# Altium PCB PowerBoard.PcbDoc
Units mm, origin at the board's own origin, x right, y up, seen from the top; angles counter-clockwise.
Board outline 97.03 x 53.34 mm, 2 copper layers (Top Layer, Bottom Layer); 64 components, 48 nets, 194 pads, 43 vias.
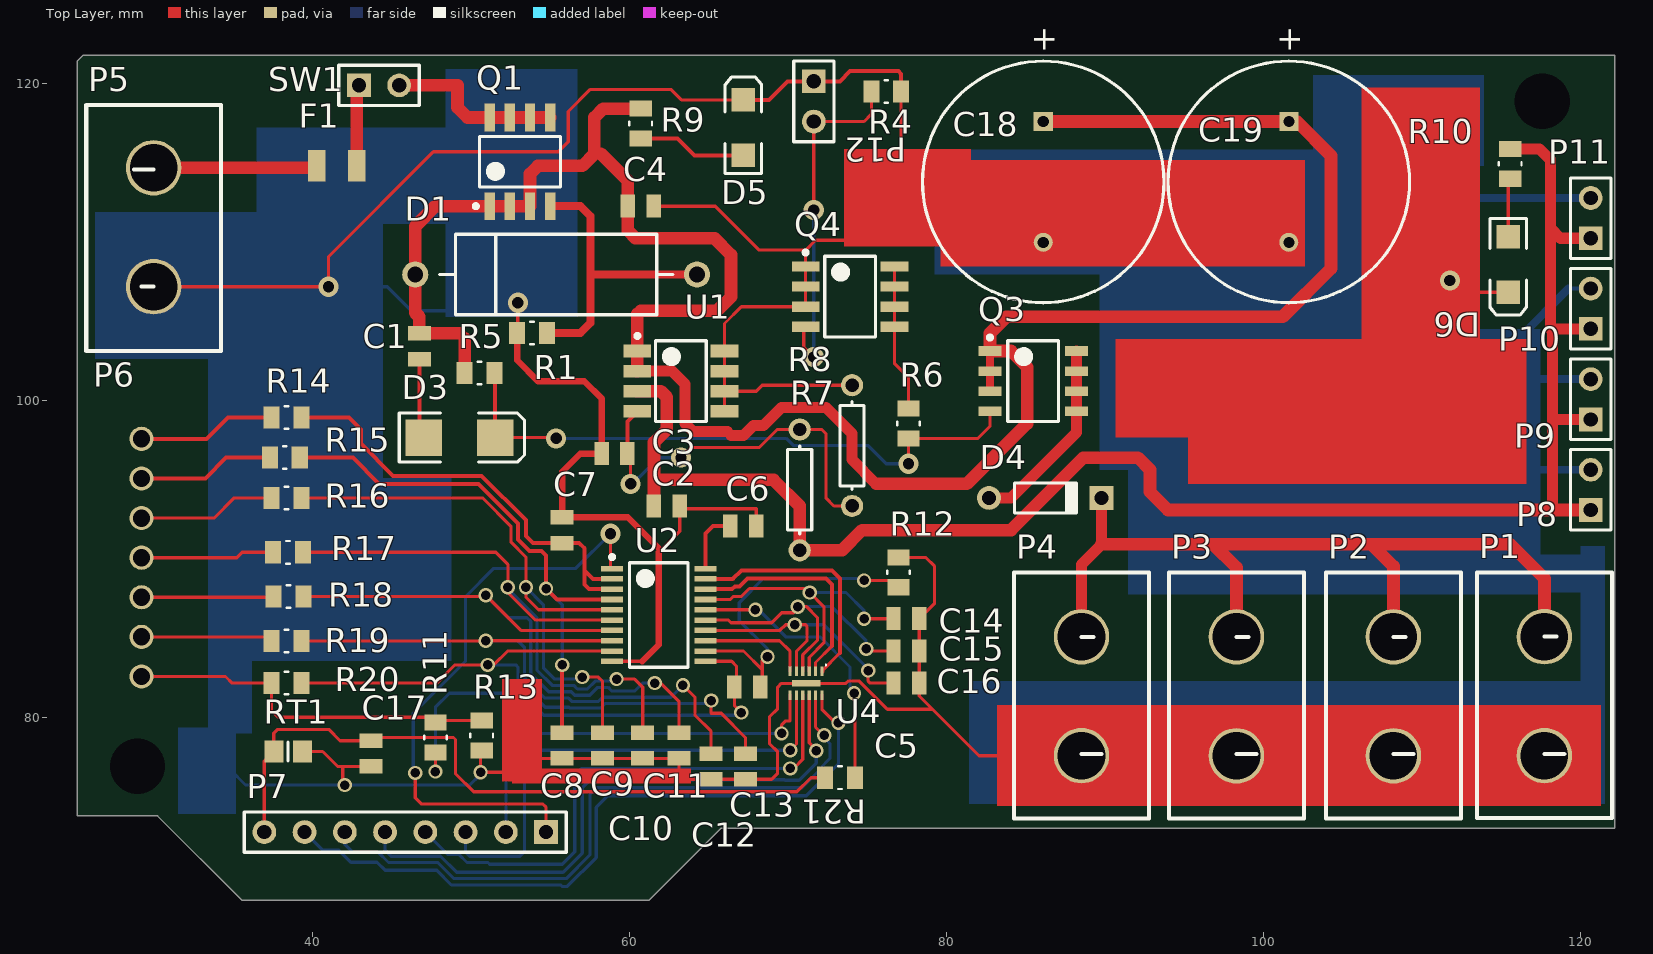
[diagram p0: Top Layer view]
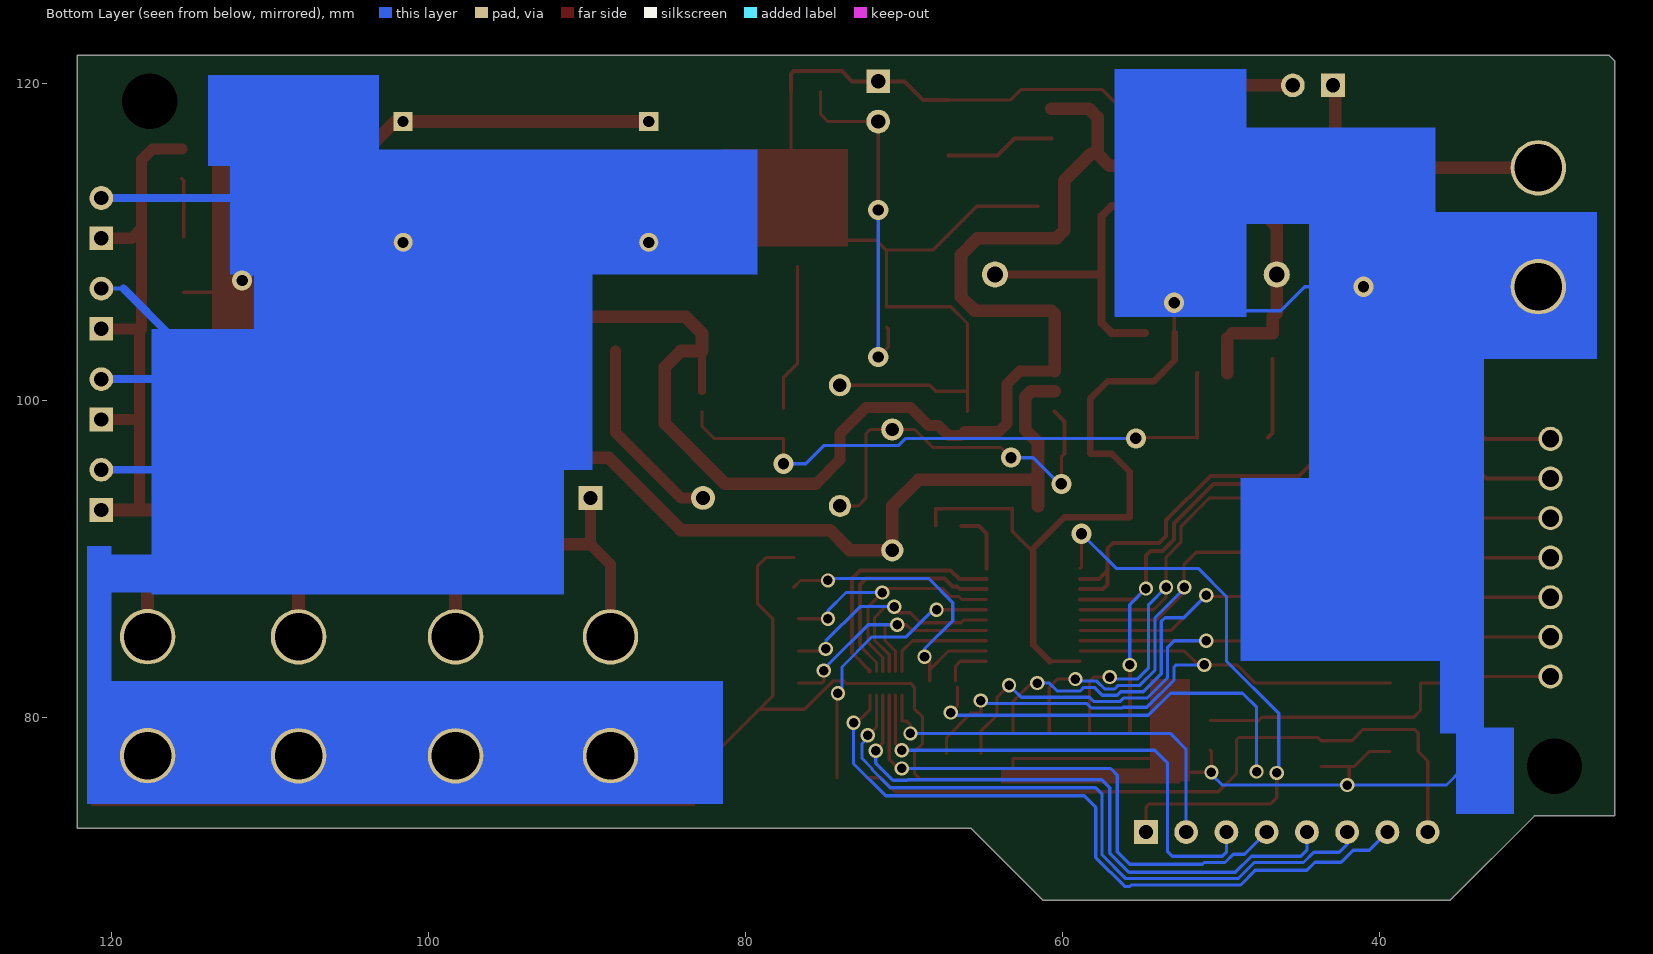
[diagram p1: Bottom Layer view, seen from below]

## Layer stack, top to bottom
Top Solder: solder mask 0.0102, Solder Resist, Dk 3.5
Top Layer: signal copper 0.0356
Dielectric 1: dielectric 0.32, FR-4, Dk 4.8
Bottom Layer: signal copper 0.0356
Bottom Solder: solder mask 0.0102, Solder Resist, Dk 3.5

## Board outline
25.527,121.793 122.174,121.793 122.174,73.025 65.786,73.025 61.214,68.453 35.56,68.453 30.226,73.787 25.146,73.787 25.146,121.412

## Design rules (kind name [scope] priority, off if disabled: settings)
Clearance [All] p1: gap=0.2 ignorepadtopadclearanceinfootprint=FALSE except(0: Arc-Hole Track-Hole SMDPad-Hole THPad-Hole Via-Hole Fill-Hole Poly-Hole Region-Hole Text-Hole)
ComponentClearance [All] p1: gap=0.2 collisioncheckmode=3 verticalgap=0.254 showdistances=FALSE
HoleSize [All] p1: absolutevalues=TRUE maxlimit=4 minlimit=0.025 maxpercent=80.000 minpercent=20.000
MinimumSolderMaskSliver [All] p1: minsoldermaskwidth=0.09
PolygonConnect [All] p1: connectstyle=Relief reliefconductorwidth=0.254 reliefentries=4 polygonreliefangle="90 Angle" airgapwidth=0.254
RoomDefinition PowerBoard_Rev1 [InComponentClass('PowerBoard_Rev1')] p1: confinementstyle=ConfineIn formatcopy=TRUE lockcomponents=FALSE outline 122.047,123.19 122.174,123.063 122.174,72.898 122.047,72.771 69.088,72.771 64.77,68.453 35.56,68.453 30.226,73.787 25.146,73.787 25.146,122.428 25.908,123.19
RoutingVias [All] p1: holewidth=0.711 width=1.27 viastyle="Through Hole" minholewidth=0.711 minwidth=1.27 maxholewidth=0.711 maxwidth=1.27
SilkToSilkClearance [All] p1 off: silktosilkclearance=0.254
SilkToSolderMaskClearance [IsPad] p1: minsilkscreentomaskgap=0.05 clearancetoexposedcopper=TRUE
SolderMaskExpansion [All] p1: expansion=0.102
Width [All] p1: maxlimit=1 minlimit=0.15 preferedwidth=0.254 minimp=50.000000 maximp=50.000000 favimp=50.000000
25 further rules are at their usual default settings.

## Components (designator, comment, footprint, x,y, rotation, side; value= is the part's Value field where it differs from the comment)
C1 "1uF-0805" CAPC2013X110N 46.736,103.429 r90 top
C2 "2.2uF" CAPC2013X110N 62.357,93.345 r180 top
C3 "470pF" CAPC2013X110N 59.055,96.647 r0 top
C4 "1uF" CAPC2013X110N 60.706,112.262 r0 top
C5 "100nF-0805" CAPC2013X110N 67.437,81.915 r0 top
C6 "1uF-0805" CAPC2013X110N 67.183,92.075 r0 top
C7 "1uF-0805" CAPC2013X110N 55.753,91.821 r270 top
C8 "1uF-0805" CAPC2013X110N 55.753,78.232 r90 top
C9 "1uF-0805" CAPC2013X110N 58.293,78.232 r90 top
C10 "1uF-0805" CAPC2013X110N 60.833,78.232 r90 top
C11 "1uF-0805" CAPC2013X110N 63.119,78.232 r90 top
C12 "1uF-0805" CAPC2013X110N 65.151,76.911 r90 top
C13 "1uF-0805" CAPC2013X110N 67.31,76.911 r90 top
C14 "1uF-0805" CAPC2013X110N 77.47,86.233 r0 top
C15 "100nF" CAPC2013X110N 77.47,84.201 r0 top
C16 "100nF" CAPC2013X110N 77.47,82.169 r0 top
C17 "100nF" CAPC2013X110N 43.688,77.724 r90 top
C18 "Cap Pol1" RB7.6-15 86.106,113.792 r90 top value=47uF
C19 "Cap Pol1" RB7.6-15 101.6,113.792 r90 top value=47uF
D1 "D Zener" DIODE-0.7 55.372,107.95 r180 top
D3 "D Schottky" SMB 49.276,97.663 r0 top
D4 "TVS Diode" DO-35 86.233,93.853 r0 top
D5 "LED2" 3.2X1.6X1.1 67.183,117.221 r90 top
D6 "LED2" 3.2X1.6X1.1 115.443,108.585 r270 top
F1 "Fuse 1206" PCBComponent_1#1 43.815,114.427 r0 top
P1 "XT60-MotorB1" PCBComponent_1#2 121.979,89.147 r270 top
P2 "XT60-MotorB2" PCBComponent_1#2 112.454,89.133 r270 top
P3 "XT60" PCBComponent_1#2 102.548,89.133 r270 top
P4 "XT60" PCBComponent_1#2 92.769,89.14 r270 top
P5 "XT60-BATTIN" PCBComponent_1#2 25.722,103.131 r90 top
P6 "BattConn" 6sBattConn 31.623,85.633 r90 top
P7 "Header 8" HDR1X8 54.737,72.771 r180 top
P8 "Header 2" HDR1X2 120.65,93.091 r90 top
P9 "Header 2" HDR1X2 120.65,98.806 r90 top
P10 "Header 2" HDR1X2 120.65,104.521 r90 top
P11 "Header 2" HDR1X2 120.65,110.236 r90 top
P12 "Header 2" HDR1X2 71.628,120.142 r270 top
Q1 "AO4882" SOIC127P600X170-8N#1 53.086,115.062 r90 top
Q3 "Mosfet P Channel" SOIC127P600X170-8N#2 85.471,101.219 r0 top
Q4 "AO4882" SOIC127P600X170-8N#1 73.914,106.553 r0 top
R1 "100k - 0805" RESC2013X65N 53.848,104.267 r180 top
R4 "10k - 0805" RESC2013X65N 76.2,119.507 r0 top
R5 "100k - 0805" RESC2013X65N 50.536,101.727 r0 top
R6 "1k - 0805" RESC2013X65N 77.597,98.552 r90 top
R7 "91k" AXIAL-0.3 70.739,94.361 r90 top value=2.3K
R8 "274k" AXIAL-0.3 74.041,97.155 r90 top value=2.3K
R9 "2.3k-0805" RESC2013X65N 60.706,117.475 r90 top
R10 "330-0805" RESC2013X65N 115.57,114.935 r90 top
R11 "1k-0805" RESC2013X65N 47.752,78.74 r90 top
R12 "1k-0805" RESC2013X65N 76.962,89.154 r90 top
R13 "1-2mohm-0805" RESC2013X65N 50.673,78.867 r270 top
R14 "47-0805" RESC2013X65N 38.354,98.933 r0 top
R15 "47-0805" RESC2013X65N 38.252,96.393 r0 top
R16 "47-0805" RESC2013X65N 38.354,93.853 r0 top
R17 "47-0805" RESC2013X65N 38.456,90.424 r0 top
R18 "47-0805" RESC2013X65N 38.481,87.63 r0 top
R19 "47-0805" RESC2013X65N 38.354,84.836 r0 top
R20 "47-0805" RESC2013X65N 38.354,82.169 r0 top
R21 "10k-0805" RESC2013X65N 73.279,76.2 r180 top
RT1 "10k Thermistor" 6-0805_N 38.456,77.851 r0 top
SW1 "SPST" HDR1X2 42.926,119.888 r0 top
U1 "LDO" SOIC127P600X170-8N#3 63.246,101.219 r0 top
U2 "TI BMS" TSOP65P640X120-20N 61.849,86.468 r0 top
U4 "EMI Filter" Filter 69.236,82.407 r180 top

## Footprints (in the part's own frame and the unit in brackets; to place one, negate y for a bottom-side part, rotate by r counter-clockwise, add the part's x,y. Pads: shape width x height; smd on the part's side, far side on the other; paste and mask are expansions set on the pad)
3.2X1.6X1.1 [mm] "SMT LED; 2 Flat Leads"
  rect 1.5x1.5 smd: 1(-1.75,0) 2(1.75,0)
  silkscreen extent -2.9,-1.15 3.2,1.15
6-0805_N [mm] "Chip Resistor, Body 2.0x1.2mm, IPC Medium Density"
  rect 1.2x1.4 smd: 1(-0.9,0) 2(0.9,0)
  silkscreen extent 0,-0.6 0,0.6, body extent -1.07,-0.7 1.07,0.7, height 0.7
6sBattConn [mil] "6s Molex Battery Connector"
  round 60 hole 43.31: GND(-120,95) VC1(-21.65,95) VC2(76.85,95) VC3(175.2,95) VC4(273.62,95) VC5(371.97,95) VC6(470.47,95)
  body extent -215,-31 565,221, height 256
AXIAL-0.3 [mm] "Axial Device, Thru-Hole; 2 Leads; 0.3 in Pin Spacing"
  round 1.4 hole 0.85: 1(-3.81,0) 2(3.81,0)
  silkscreen extent -2.77,-0.76 2.77,0.76
CAPC2013X110N [mil]
  rect 36x57 smd: 1(-32,0) 2(32,0)
DIODE-0.7 [mm] "Diode, Thru-Hole; 2 Leads; 0.7 in Pin Spacing"
  round 1.65 hole 1: 1(-8.89,0) 2(8.89,0)
  silkscreen extent -7.37,-2.54 7.37,2.54
DO-35 [mm] "Diode, Axial; Body 3.8 x 1.9 mm (LxDia. max), Lead Dia. 0.53 mm (max)"
  round 1.5 hole 0.9: 1(-3.55,0)
  rect 1.5x1.5 hole 0.9: 2(3.55,0)
  silkscreen extent -1.95,-0.95 2.05,0.95
Filter [mm] "EMIFilter"
  rect 0.2x0.6 smd mask+0.05: 1(-2.9,-0.5) 2(-2.5,-0.5) 3(-2.1,-0.5) 4(-1.7,-0.5) 5(-1.3,-0.5) 6(-0.9,-0.5) 7(-2.9,1) 8(-2.5,1) 9(-2.1,1) 10(-1.7,1) 11(-1.3,1) 12(-0.9,1)
  rect 1.8x0.4 smd: GND(-1.905,0.254)
  silkscreen extent -3.2,-0.95 -3.1,-0.85
HDR1X2 [mm] "Connector; Header; 2 Position"
  rect 1.5x1.5 hole 0.9: 1(0,0)
  round 1.5 hole 0.9: 2(2.54,0)
  silkscreen extent -1.27,-1.27 3.81,1.27
HDR1X8 [mm] "Connector; Header; 8 Position"
  rect 1.5x1.5 hole 0.9: 1(0,0)
  round 1.5 hole 0.9: 2(2.54,0) 3(5.08,0) 4(7.62,0) 5(10.16,0) 6(12.7,0) 7(15.24,0) 8(17.78,0)
  silkscreen extent -1.27,-1.27 19.05,1.27
PCBComponent_1#1 [mm]
  rect 1.1x2 smd: 1(-3.556,0.381) 2(-1.016,0.381)
PCBComponent_1#2 [mm]
  round 3.5 hole 3: 1(4.05,-4.25) 2(11.55,-4.25)
  silkscreen extent 0,-8.5 15.5,0
RB7.6-15 [mm] "Polarized Capacitor (Radial); 2 Leads"
  rect 1.2x1.2 hole 0.7: 1(3.81,0)
  round 1.2 hole 0.7: 2(-3.81,0)
  silkscreen extent -7.62,-7.62 7.62,7.62
RESC2013X65N [mil]
  rect 40x55 smd: 1(-37,0) 2(37,0)
  silkscreen extent -4,-28 4,28
SMB [mm] "DO-214-AA/SMB; 2 C-Bend Leads; Body 5.3 x 3.6 mm, inc. leads (LxW)"
  rect 2.3x2.3 smd: 1(-2.25,0) 2(2.25,0)
  silkscreen extent -3.8,-1.55 4.1,1.55
SOIC127P600X170-8N#1 [mm] "SOIC, 8-Leads, Body 5.00x3.90mm, Pitch 1.27mm, IPC Medium Density"
  rect 1.75x0.65 smd: D(2.8,-1.905) D(2.8,-0.635) D(2.8,0.635) D(2.8,1.905) G(-2.8,-1.905) S(-2.8,-0.635) S(-2.8,0.635) S(-2.8,1.905)
  silkscreen extent -2.92,-2.55 1.6,2.9, body extent -2,-2.55 2,2.55, height 1.7
SOIC127P600X170-8N#2 [mm] "SOIC, 8-Leads, Body 5.00x3.90mm, Pitch 1.27mm, IPC Medium Density"
  rect 1.45x0.6 smd: D(2.725,-1.905) D(2.725,-0.635) D(2.725,0.635) D(2.725,1.905) G(-2.725,-1.905) S(-2.725,-0.635) S(-2.725,0.635) S(-2.725,1.905)
  silkscreen extent -2.85,-2.55 1.6,2.88, body extent -2,-2.55 2,2.55, height 1.7
SOIC127P600X170-8N#3 [mm] "SOIC, 8-Leads, Body 5.00x3.90mm, Pitch 1.27mm, IPC Medium Density"
  rect 1.75x0.8 smd: ADJ/BYP(-2.75,-1.905) EN(-2.75,1.905) GND(2.75,-1.905) GND(2.75,-0.635) GND(2.75,0.635) GND(2.75,1.905) IN(-2.75,0.635) OUT(-2.75,-0.635)
  silkscreen extent -2.87,-2.55 1.6,2.98, body extent -2,-2.55 2,2.55, height 1.7
TSOP65P640X120-20N [mm] "TSOP, 20-Leads, Body 6.40x4.40mm, Pitch 0.65mm, IPC Medium Density"
  rect 1.4x0.35 smd: ALERT(2.95,-1.625) BAT(-2.95,2.275) SCL(2.95,2.275) SDA(2.95,1.625) SENSEN(2.95,-2.925) SENSEP(2.95,-2.275) V3P3(2.95,2.925) VC0(-2.95,-2.275) VC1(-2.95,-1.625) VC2(-2.95,-0.975) VC3(-2.95,-0.325) VC4(-2.95,0.325) VC5(-2.95,0.975) VC6(-2.95,1.625) VCOUT(2.95,-0.325) VCTL(-2.95,2.925) VIOUT(2.95,-0.975) VREF(2.95,0.975) VSS(-2.95,-2.925) VTB(2.95,0.325)
  silkscreen extent -3.07,-3.3 1.85,3.77, body extent -2.25,-3.3 2.25,3.3, height 1.2

## Part data
C1 C2 C3 C4 C5 C6 C7 C8 C9 C10 C11 C12 C13 C14 C15 C16 C17: library part C0805C104K5RACTU, "Capacitor; Ceramic; Cap; .100UF ; Tol+-10%; SMD; Vol-Rtg 50V; X7R, Tape/Reel", Package="0805 Kemet", Availability=Good, MF=Kemet, MP=C0805C104K5RACTU, Price="0.86 USD"
C18 C19: "Polarized Capacitor (Radial)", LatestRevisionDate=17-Jul-2002, LatestRevisionNote="Re-released for DXP Platform.", PackageDescription="Polarized Capacitor (Radial); 2 Leads", PackageReference=RB7.6-15, Published=8-Jun-2000, Publisher="Altium Limited"
D1: "Zener Diode", LatestRevisionDate=17-Jul-2002, LatestRevisionNote="Re-released for DXP Platform.", PackageDescription="Diode, Thru-Hole; 2 Leads; 0.7 in Pin Spacing", PackageReference=DIODE-0.7, Published=8-Jun-2000, Publisher="Altium Limited"
D3: "Schottky Diode", Code_JEDEC=DO-214-AA, LatestRevisionDate=17-Jul-2002, LatestRevisionNote="Re-released for DXP Platform.", PackageDescription="DO-214-AA/SMB; 2 C-Bend Leads; Body 5.3 x 3.6 mm, inc. leads (LxW)", PackageReference=SMB, Published=8-Jun-2000, Publisher="Altium Limited"
D4: library part "Diode 1N914", "High Conductance Fast Diode", Code_JEDEC=DO-204-AH, ComponentLink1Description="Manufacturer Link", ComponentLink1URL=http://www.fairchildsemi.com/, ComponentLink2Description=Datasheet, ComponentLink2URL=http://www.fairchildsemi.com/ds/1N%2F1N4448.pdf, DatasheetVersion=1997, LatestRevisionDate=17-Jul-2002, LatestRevisionNote="Re-released for DXP Platform.", PackageDescription="Diode, Axial; Body 3.8 x 1.9 mm (LxDia. max), Lead Dia. 0.53 mm (max)", PackageReference=DO-35, Published=8-Jun-2000, Publisher="Altium Limited"
D5 D6: "Typical RED, GREEN, YELLOW, AMBER GaAs LED", LatestRevisionDate=17-Jul-2002, LatestRevisionNote="Re-released for DXP Platform.", PackageDescription="SM LED; 2 Flat Leads", PackageReference=3.2X1.6X1.1, PackageVersion=Feb-2002, Published=8-Jun-2000, Publisher="Altium Limited"
F1: library part F?
P1 P2 P3 P4 P5 P6 Q1 Q4: library part Component_1
P7: "Header, 8-Pin", LatestRevisionDate=17-Jul-2002, LatestRevisionNote="Re-released for DXP Platform.", Publisher="Altium Limited"
P8 P9 P10 P11 P12: "Header, 2-Pin", LatestRevisionDate=17-Jul-2002, LatestRevisionNote="Re-released for DXP Platform.", Publisher="Altium Limited"
Q3: library part Q?
R1 R4 R5 R6 R9 R10 R11 R12 R13 R14 R15 R16 R17 R18 R19 R20 R21: library part RC0805FR-072K2L, "Res Thick Film 0805 2.2K Ohm 1% 0.125W_1/8W_ }100ppm/ Molded SMD Paper T/R", Package="0805 Yageo", Availability=Good, MF=Yageo, MP=RC0805FR-072K2L, Price="0.01 USD", SnapEDA_Link=https://www.snapeda.com/parts/RC0805FR-072K2L/Yageo/view-part/?ref=snap
R7 R8: library part Res1, "Resistor", LatestRevisionDate=17-Jul-2002, LatestRevisionNote="Re-released for DXP Platform.", PackageDescription="Axial Device, Thru-Hole; 2 Leads; 0.3 in Pin Spacing", PackageReference=AXIAL-0.3, Published=8-Jun-2000, Publisher="Altium Limited"
RT1: library part "Res Thermal", "490-2456-1-ND", Code_IPC=RESC2012, LatestRevisionDate=29-May-2009, LatestRevisionNote="IPC-7351 Footprint Added.", PackageDescription="Chip Resistor 0805 Case Size", PackageReference=6-0805, PackageVersion=Mar-2003, Published=24-Mar-1999, Publisher="Altium Limited"
SW1: library part "Header 2", "SPST Switch", LatestRevisionDate=17-Jul-2002, LatestRevisionNote="Re-released for DXP Platform.", Publisher="Altium Limited"
U1 U2: library part U?
U4: library part EMIFilter

## Free pads (board coordinates)
  round 1.524 hole 3.5: 2(28.956,76.911) 2(117.602,118.872)

## Via types
v1: diameter 0.9, hole 0.6, Top Layer to Bottom Layer, tented both sides, 33 vias
v2: diameter 1.27, hole 0.711, Top Layer to Bottom Layer, 10 vias

## Nets (pads, with @x,y where several pads share a name; then routed paths per layer and width w, separated by ;. In a path a pad name is that pad's centre, name@x,y a point inside that pad or via, vN(x,y) a via of type N, cw(c..) or ccw(c..) an arc to the next point about the centre after c; other vN are vias at no path point)
+5V: C2.2 P8.1 P9.1 P10.1 P11.1 R7.1 R10.2 U1.OUT | length 109.2
  Top Layer w0.254: 118.11,104.496 118.237,104.369 118.389,104.521 ; 118.237,99.06 118.491,98.806
  Top Layer w0.7: R10.2 117.424,115.875 118.11,115.189 118.11,110.871 ; 118.11,104.496 118.11,110.871 ; 118.237,93.091 118.237,99.06 118.237,104.369 ; 118.389,104.521 P10.1 ; 118.491,98.806 P9.1 ; P11.1 118.745,110.236 118.11,110.871
  Top Layer w0.8: U1.OUT 61.976,100.584 62.357,100.203 62.357,98.171 61.544,97.358 61.544,94.996 ; C2.2 61.544,94.996 ; P8.1 118.237,93.091 93.98,93.091 92.837,94.234 92.837,95.631 92.075,96.393 88.646,96.393 84.074,91.821 74.676,91.821 73.406,90.551 R7.1 70.739,93.345 69.088,94.996 61.544,94.996
+HV: D4.2 P1.1 P2.1 P3.1 P4.1 | length 54.6
  Top Layer w0.7: P4.1 88.519,89.662 89.783,90.926 D4.2
  Top Layer w0.8: 89.783,90.926 96.831,90.926 ; P3.1@98.298,85.097 98.298,89.459 96.831,90.926 ; P2.1@108.204,85.097 108.204,89.535 106.813,90.926 ; P1.1 117.729,88.773 115.576,90.926 106.813,90.926 ; 96.831,90.926 106.813,90.926
+Vbat: F1.1 P5.2 | length 10.3
  Top Layer w0.254: F1.1@40.132,114.681 F1.1
  Top Layer w0.8: P5.2 F1.1@40.132,114.681
+Vcc: C1.2 C4.1 C18.1 C19.1 D1.2 Q1.S Q3.S R5.1 R9.2 U1.EN U1.IN | length 150
  Top Layer w0.2: 60.496,105.454 60.706,105.664 ; C19.1 C19.1@102.108,117.602
  Top Layer w0.4: 66.167,98.044 66.421,97.79
  Top Layer w0.5: 49.276,104.242 49.596,103.921 ; 57.785,115.57 58.191,115.57 ; Q3.S@82.746,100.584 82.746,101.854 Q3.S@82.746,103.124
  Top Layer w0.7: U1.IN 62.688,101.854 63.5,101.042 63.5,98.552 64.008,98.044 66.167,98.044 ; 66.421,97.79 67.191,97.79 67.826,98.425 68.459,98.425 69.602,99.568 72.39,99.568 74.041,97.917 74.041,96.266 75.565,94.742
  Top Layer w0.8: 49.276,104.242 C1.2 46.736,105.283 46.482,105.537 D1.2 46.482,110.998 47.746,112.262 51.181,112.262 52.451,112.262 53.721,112.262 53.721,114.3 54.229,114.808 57.023,114.808 57.785,115.57 57.785,117.856 58.344,118.415 R9.2 ; R5.1 49.596,103.921 ; 58.191,115.57 59.893,113.868 C4.1 59.893,110.719 60.376,110.236 65.361,110.236 66.407,109.19 66.407,106.539 65.532,105.664 60.706,105.664 ; U1.IN U1.EN 60.496,105.454 ; 75.565,94.742 81.28,94.742 85.09,98.552 85.09,102.108 84.074,103.124 82.746,103.124 82.746,104.242 83.787,105.283 101.219,105.283 104.267,108.331 104.267,115.443 C19.1@102.108,117.602 ; C18.1 C19.1
ALERT_OUT: P7.2 U4.12 | length 25.8
  Top Layer w0.2: v1(69.596,78.994) 69.596,79.534 69.85,79.788 70.136,79.788 U4.12
  Bottom Layer w0.2: P7.2 52.197,77.978 53.213,78.994 v1(69.596,78.994)
GND: C2.1 C3.1 C4.2 C6.2 C7.1 C8.1 C9.1 C10.1 C11.1 C12.1 C13.1 C14.2 C15.2 C16.2 C17.1 C18.2 C19.2 D5.2 D6.2 P1.2 P2.2 P3.2 P4.2 P5.1 P8.2 P9.2 P10.2 P11.2 P12.1 Q4.S R1.2 R4.2 R8.2 R12.2 R13.2 RT1.2 U1.GND U2.VSS U4.GND | length 384.3
  Top Layer w0.2: P5.1 v2(41.014,107.181) 41.014,109.086 47.625,115.697 55.499,115.697 56.134,116.332 56.134,118.237 57.531,119.634 62.611,119.634 63.274,118.971 D5.2 ; RT1.2 40.633,77.851 41.573,76.911 41.91,76.911 ; v1@41.91,75.819 41.91,76.911 ; C17.1 41.91,76.911 ; R13.2 50.604,77.858 v1(50.604,76.542) 52.793,76.542 53.67,77.419 C8.1 C9.1 C10.1 C11.1 63.119,76.708 63.729,76.098 C12.1 C13.1 68.967,76.098 69.342,76.473 69.342,77.834 68.834,78.342 68.834,80.047 69.342,80.555 69.342,81.915 69.58,82.153 U4.GND 73.644,82.153 73.787,82.296 74.491,82.296 76.269,80.518 79.121,80.518 ; R1.2 52.953,104.312 v2(52.953,106.172) ; U2.VSS 60.81,83.543 ; C4.2 65.411,112.262 68.186,109.487 71.114,109.487 ; 61.849,90.678 61.849,90.424 63.17,91.745 63.17,93.218 63.221,93.167 67.996,93.167 C6.2 ; U1.GND@65.996,99.314 U1.GND@65.996,100.584 ; R8.2 68.377,100.965 67.996,100.584 U1.GND@65.996,100.584 ; R12.2 78.689,90.094 79.248,89.535 79.248,87.198 C14.2 C15.2 C16.2 78.283,81.356 79.121,80.518 ; R4.2 77.14,110.16 77.089,110.109 ; C19.2 C18.2 85.979,110.109 77.089,110.109 ; 106.299,100.457 111.76,105.918 v2(111.76,107.569) ; v2@112.014,107.181 112.36,106.835 D6.2 ; P1.2 117.722,77.59 P4.2 82.049,77.59 79.121,80.518 ; U1.GND@65.996,100.584 65.996,101.854 65.996,103.124 65.996,104.858 67.056,105.918 71.114,105.918 71.114,107.188 71.114,108.458 71.114,109.487 ; 71.114,109.487 71.736,110.109 77.089,110.109
  Top Layer w0.254: D5.2 68.806,118.971 69.977,120.142 P12.1 73.279,120.142 73.914,120.777 76.962,120.777 77.14,120.599 R4.2
  Top Layer w0.4: R1.2 52.908,102.54 54.229,101.219 57.15,101.219 58.242,100.127 C3.1 56.896,96.647 55.753,95.504 C7.1 59.893,92.634 61.849,90.678 ; 60.81,83.543 61.849,84.582 61.849,90.424
  Bottom Layer w0.2: P5.1 30.36,107.181 34.798,102.743 34.798,76.708 35.769,75.737 v1(42.037,75.737) 49.918,75.737 v1@50.546,76.365 ; v2(41.014,107.181) 44.711,107.181 46.228,105.664 52.699,105.664 v2@52.953,105.918 ; C19.2 109.093,109.982 111.506,107.569 v2(111.76,107.569)
  Bottom Layer w0.254: 119.253,107.061 P10.2
  Bottom Layer w0.5: 110.871,112.776 P11.2 ; 114.3,95.631 P8.2 ; 115.697,101.346 P9.2 ; 116.205,104.013 119.253,107.061
NetC1_1: C1.1 D3.1 | length 5.1
  Top Layer w0.254: C1.1 46.736,97.953 D3.1
NetC3_2: C3.2 R7.2 R8.1 U1.ADJ/BYP | length 24.2
  Top Layer w0.2: C3.2 60.071,96.444 v2(60.071,94.742) ; v2@63.373,96.52 63.881,97.028 68.167,97.028 69.31,98.171 R7.2 72.136,98.171 72.39,97.917 72.39,93.853 72.898,93.345 R8.1
  Top Layer w0.254: C3.2 59.868,98.686 U1.ADJ/BYP
  Bottom Layer w0.2: v2@60.325,94.869 61.849,96.393 v2(63.246,96.393)
NetC5_1: C5.1 R11.1 U2.SENSEN | length 30.1
  Top Layer w0.2: v1@47.752,76.708 R11.1 ; U2.SENSEN 66.444,83.543 66.751,83.236 C5.1@66.751,82.296 ; C5.1 66.624,80.741 v1(67.056,80.309)
  Bottom Layer w0.2: v1(47.752,76.587) 47.752,80.645 48.641,81.534 53.187,81.534 54.584,80.137 v1@66.929,80.137
NetC5_2: C5.2 R12.1 U2.SENSEP | length 20.6
  Top Layer w0.2: U2.SENSEP 67.191,84.193 68.377,83.007 ; C5.2@68.377,82.296 68.377,83.007 ; v1@68.618,83.82 68.377,83.579 68.377,83.007 ; v1(74.803,88.646) 76.53,88.646 R12.1
  Bottom Layer w0.2: v1(68.707,83.84) 68.707,84.328 66.929,86.106 66.929,87.249 68.453,88.773 74.549,88.773 v1@74.676,88.646
NetC6_1: C6.1 U2.V3P3 | length 4
  Top Layer w0.254: U2.V3P3 64.799,91.596 65.278,92.075 C6.1
NetC7_2: C7.2 R14.2 U2.BAT U2.VC6 | length 28.5
  Top Layer w0.254: R14.2 42.291,98.933 43.053,98.171 43.053,97.282 45.085,95.25 50.673,95.25 53.467,92.456 53.467,91.44 53.899,91.008 C7.2 56.82,91.008 57.15,90.678 57.15,89.281 ; U2.VC6 57.449,88.093 57.15,88.392 57.15,89.281 ; U2.BAT 57.688,88.743 57.15,89.281
NetC8_2: C8.2 R15.2 U2.VC5 | length 34.7
  Top Layer w0.254: R15.2 42.545,96.393 44.196,94.742 50.463,94.742 52.959,92.246 52.959,91.23 53.688,90.5 54.452,90.5 54.737,90.215 v1(54.737,88.138) 55.432,87.443 U2.VC5 ; C8.2 v1(55.753,83.312)
  Bottom Layer w0.2: v1(54.737,88.138) 55.753,87.122 v1(55.753,83.312)
NetC9_2: C9.2 R16.2 U2.VC4 | length 37.1
  Top Layer w0.2: R16.2 50.724,93.853 52.532,92.045 52.532,91.053 53.467,90.118 v1@53.467,88.392 ; v1(53.467,88.22) 53.467,87.585 54.259,86.793 U2.VC4 ; v1(57.023,82.55) 58.039,82.55 58.293,82.296 C9.2
  Bottom Layer w0.2: v1(53.467,88.22) 54.565,87.122 54.565,83.138 55.28,82.423 v1@56.769,82.423
NetC10_2: C10.2 R17.2 U2.VC3 | length 38.5
  Top Layer w0.2: R17.2 51.562,90.424 52.324,89.662 v1(52.324,88.22) 52.324,87.884 54.065,86.143 U2.VC3 ; v1(59.182,82.423) 60.325,82.423 60.833,81.915 C10.2
  Bottom Layer w0.2: v1(52.324,88.22) 52.324,88.138 54.165,86.297 54.165,82.972 55.114,82.023 56.489,82.023 56.712,81.8 57.334,81.8 57.83,82.296 v1@58.928,82.296
NetC11_2: C11.2 R18.2 U2.VC2 | length 39.6
  Top Layer w0.2: R18.2 v1@50.673,87.63 ; v1(50.927,87.712) 53.146,85.493 U2.VC2 ; v1(61.595,82.169) 61.976,82.169 63.119,81.026 C11.2
  Bottom Layer w0.2: v1(50.927,87.712) 52.342,86.297 53.53,86.297 53.765,86.062 53.765,82.76 54.902,81.623 56.324,81.623 56.547,81.4 57.499,81.4 57.995,81.896 58.648,81.896 58.871,81.673 60.337,81.673 60.833,82.169 v1@61.341,82.169
NetC12_2: C12.2 R19.2 U2.VC1 | length 39.8
  Top Layer w0.2: R19.2 v1@50.8,84.836 ; v1(50.927,84.842) 58.898,84.842 U2.VC1 ; v1(63.373,82.042) 64.135,81.28 64.135,80.137 65.151,79.121 C12.2
  Bottom Layer w0.2: v1(50.927,84.842) 52.953,84.842 53.365,84.43 53.365,82.525 54.667,81.223 56.158,81.223 56.381,81 58.013,81 58.293,81.28 58.699,81.28 58.706,81.273 60.503,81.273 60.51,81.28 62.611,81.28 v1@63.131,81.8
NetC13_2: C13.2 R20.2 U2.VC0 | length 40.5
  Top Layer w0.2: R20.2 47.828,82.169 48.971,83.312 v1@50.724,83.312 ; v1(51.054,83.318) 51.441,83.318 52.316,84.193 U2.VC0 ; v1(65.151,81.071) 65.151,80.264 65.786,80.264 67.31,78.74 C13.2
  Bottom Layer w0.2: v1(51.054,83.318) 52.826,83.318 52.965,83.179 52.965,82.359 54.679,80.645 56.17,80.645 56.215,80.6 58.179,80.6 58.452,80.873 v1@65.125,80.873
NetC14_1: C14.1 U2.VREF U4.3 | length 18.4
  Top Layer w0.2: U2.VREF 66.363,87.443 66.55,87.63 67.056,87.63 67.564,88.138 v1@71.202,88.138 ; U4.3 71.336,83.782 72.263,84.709 72.263,86.995 v1(71.374,87.884) ; v1(74.803,86.233) C14.1
  Bottom Layer w0.2: v1(71.374,87.884) 73.66,87.884 74.803,86.741 v1@74.803,86.487
NetC15_1: C15.1 U2.VCOUT U4.4 | length 18.5
  Top Layer w0.2: U2.VCOUT 66.243,86.143 66.407,85.979 68.967,85.979 69.596,86.608 70.352,86.608 70.358,86.614 ; v1(70.612,86.995) 71.172,86.995 71.863,86.304 71.863,84.875 70.936,83.948 U4.4 ; v1(74.93,84.328) 75.057,84.201 C15.1
  Bottom Layer w0.2: v1(70.612,86.995) 72.771,86.995 74.93,84.836 v1@74.93,84.582
NetC16_1: C16.1 U2.VIOUT U4.5 | length 17.7
  Top Layer w0.2: U2.VIOUT 69.491,85.493 69.85,85.852 v1@70.104,85.852 ; v1(70.434,85.852) 71.114,85.852 71.202,85.764 71.202,84.842 70.536,84.176 U4.5 ; v1(75.057,82.958) 75.057,82.296 75.184,82.169 C16.1
  Bottom Layer w0.2: v1(70.434,85.852) 72.263,85.852 74.803,83.312 v1@74.803,82.76
NetD1_1: D1.1 Q1.G R1.1 | length 19.3
  Top Layer w0.5: R1.1 56.896,104.267 57.531,104.902 57.531,107.95 ; Q1.G 56.902,112.262 57.531,111.633 57.531,107.95 ; D1.1 57.531,107.95
NetD3_2: D3.2 Q3.G R5.2 R6.1 | length 38.6
  Top Layer w0.2: D3.2 v2@55.118,97.663 ; v2(77.597,96.012) R6.1 81.991,97.612 82.746,98.367 Q3.G
  Top Layer w0.254: R5.2 51.526,101.677 D3.2
  Bottom Layer w0.2: v2(55.372,97.612) 69.884,97.612 70.325,97.171 75.041,97.171 76.2,96.012 v2(77.597,96.012)
NetD4_1: D4.1 Q3.D | length 12.4
  Top Layer w0.7: D4.1 84.074,93.853 88.196,97.975 88.196,99.314 88.196,100.584 88.196,101.854 Q3.D@88.196,103.124
NetD5_1: D5.1 R9.1 | length 6.9
  Top Layer w0.254: R9.1 63.043,116.535 64.107,115.471 D5.1
NetD6_1: D6.1 R10.1 | length 3.7
  Top Layer w0.2: D6.1 115.443,113.868 R10.1
NetF1_2: F1.2 SW1.1 | length 5.1
  Top Layer w0.254: SW1.1@42.799,119.761 SW1.1
  Top Layer w0.8: F1.2 SW1.1@42.799,119.761
NetP7_1: P7.1 U2.VCTL | length 36.9
  Top Layer w0.2: v1(46.482,76.499) 46.482,74.93 46.863,74.549 54.513,74.549 54.737,74.325 P7.1 ; v2@58.801,91.44 58.801,89.491 U2.VCTL
  Bottom Layer w0.2: v1@46.355,76.587 46.355,80.264 49.657,83.566 49.657,87.63 51.435,89.408 56.613,89.408 v2(58.801,91.596)
NetP12_2: P12.2 Q4.G R4.1 | length 22.3
  Top Layer w0.2: Q4.G 70.993,104.527 70.993,103.378 v2(71.628,102.743) ; v2(71.628,112.014) P12.2 74.803,117.602 75.26,118.059 R4.1
  Bottom Layer w0.2: v2(71.628,102.743) v2(71.628,112.014)
NetQ1_D: Q1.D SW1.2 | length 11.2
  Top Layer w0.8: SW1.2 49.149,119.888 49.149,118.491 49.778,117.862 51.181,117.862 52.451,117.862 53.721,117.862 Q1.D@54.991,117.862
NetQ4_D: Q4.D R6.2 | length 9.3
  Top Layer w0.2: Q4.D@76.714,108.458 76.714,107.188 76.714,105.918 76.714,104.648 76.714,102.356 77.597,101.473 R6.2
NetU2_ALERT: U2.ALERT U4.6 | length 6.9
  Top Layer w0.2: U2.ALERT 69.462,84.843 70.136,84.169 U4.6
NetU2_SCL: U2.SCL U4.1 | length 15.2
  Top Layer w0.2: U4.1@72.163,82.958 73.279,84.074
  Top Layer w0.254: U2.SCL 66.514,88.743 67.052,89.281 72.771,89.281 73.279,88.773 73.279,84.074 ; U4.1@72.163,82.907 U4.1@72.163,82.958
NetU2_SDA: U2.SDA U4.2 | length 14.3
  Top Layer w0.2: U4.2 71.736,83.471 72.771,84.506
  Top Layer w0.254: U2.SDA 66.481,88.093 66.653,88.265 66.929,88.265 67.437,88.773 72.39,88.773 72.771,88.392 72.771,84.506
SCL_OUT: P7.7 U4.7 | length 44.7
  Top Layer w0.2: U4.7 72.136,80.518 v1@72.898,79.756
  Bottom Layer w0.2: P7.7 40.64,71.628 41.656,71.628 42.418,70.866 44.069,70.866 44.577,70.358 47.833,70.358 48.76,69.431 55.664,69.431 55.753,69.342 56.084,69.342 57.899,71.158 57.899,74.326 58.63,75.057 71.152,75.057 73.184,77.089 v1(73.184,79.667)
SDA_OUT: P7.6 U4.8 | length 41.9
  Top Layer w0.2: U4.8 71.736,79.394 v1@72.136,78.994
  Bottom Layer w0.2: P7.6 42.037,72.009 42.545,71.501 44.138,71.501 44.792,70.847 47.91,70.847 48.926,69.831 56.007,69.831 57.499,71.323 57.499,75.152 57.912,75.565 70.866,75.565 72.016,76.715 72.016,76.784 72.644,77.412 72.644,78.359 72.295,78.708 v1(72.295,78.873)
VC0Sense: P6.GND R11.2 R13.1 R20.1 | length 23.7
  Top Layer w0.2: P6.GND 34.509,82.585 34.925,82.169 R20.1 37.414,80.442 37.846,80.01 47.422,80.01 R11.2 47.879,79.807 R13.1
VC1Sense: P6.VC1 R19.1 | length 8.3
  Top Layer w0.2: P6.VC1 37.167,85.083 R19.1
VC2Sense: P6.VC2 R18.1 | length 8.3
  Top Layer w0.2: P6.VC2 37.496,87.585 R18.1
VC3Sense: P6.VC3 R17.1 | length 8.4
  Top Layer w0.2: P6.VC3 35.219,90.083 35.56,90.424 R17.1
VC4Sense: P6.VC4 R16.1 | length 8.7
  Top Layer w0.2: P6.VC4 33.782,92.583 35.052,93.853 R16.1
VC5Sense: P6.VC5 R15.1 | length 8.6
  Top Layer w0.254: P6.VC5 33.232,95.081 34.544,96.393 R15.1
VC6Sense: P6.VC6 R14.1 | length 8.8
  Top Layer w0.254: P6.VC6 33.321,97.583 34.671,98.933 R14.1
VCOUT_OUT: P7.4 U4.10 | length 34
  Top Layer w0.2: v1@70.409,76.835 70.936,77.362 U4.10
  Bottom Layer w0.2: P7.4 48.514,71.374 49.218,71.374 49.745,70.847 51.073,70.847 51.181,70.739 55.753,70.739 56.547,71.533 56.547,76.365 56.966,76.784 v1(70.136,76.784)
VIOUT_OUT: P7.3 U4.11 | length 31.5
  Top Layer w0.2: v1(70.136,77.927) 70.536,78.327 U4.11
  Bottom Layer w0.2: P7.3 49.657,71.501 49.911,71.247 53.086,71.247 53.365,71.526 53.365,77.114 54.178,77.927 v1(70.136,77.927)
VREF_OUT: P7.5 U4.9 | length 38.4
  Top Layer w0.2: U4.9 71.336,78.397 v1@71.628,78.105
  Bottom Layer w0.2: P7.5 44.577,71.628 44.958,71.247 48.075,71.247 49.091,70.231 55.811,70.231 57.023,71.443 57.023,75.565 57.531,76.073 69.787,76.073 69.825,76.034 70.7,76.034 71.787,77.121 v1(71.787,77.895)
VTB: R21.1 U2.VTB | length 17.4
  Top Layer w0.2: U2.VTB v1@67.691,86.793 ; v1(74.168,81.534) 74.213,81.534 74.219,81.528 R21.1
  Bottom Layer w0.2: v1(67.945,86.793) 68.147,86.793 69.857,85.083 72.016,85.083 73.914,83.185 73.914,81.915 v1@74.168,81.661
VTB_OUT: C17.2 P7.8 R21.2 RT1.1 | length 44.8
  Top Layer w0.2: P7.8 36.957,77.252 RT1.1 37.556,79.008 37.795,79.248 41.021,79.248 41.732,78.537 C17.2 43.891,78.74 48.895,78.74 49.022,78.613 49.022,76.454 50.165,75.311 70.561,75.311 71.45,76.2 R21.2

## Other copper
Top Layer:
  rectangle net GND: 73.533,109.728 81.534,115.875
  rectangle net GND: 51.943,75.946 54.483,82.423
  rectangle net GND: 52.578,75.819 63.881,76.784
  rectangle net GND: 83.185,74.422 121.285,80.772
  rectangle net GND: 106.172,102.616 113.665,119.761
  rectangle net GND: 95.25,94.742 116.586,99.492
  rectangle net GND: 90.678,97.663 116.586,103.886
  rectangle net GND: 79.629,108.458 102.616,115.189
Bottom Layer:
  rectangle net GND: 36.449,111.125 49.276,117.221
  rectangle net GND: 48.387,105.283 56.712,120.904
  rectangle net GND: 35.814,94.361 44.45,103.251
  rectangle net GND: 34.671,83.566 48.768,95.123
  rectangle net GND: 81.407,74.549 121.539,82.296
  rectangle net GND: 120.015,75.737 121.539,90.805
  rectangle net GND: 116.205,87.884 121.412,90.297
  rectangle net GND: 91.44,87.757 117.475,104.521
  rectangle net GND: 89.662,95.631 110.998,108.585
  rectangle net GND: 103.124,114.808 113.919,120.523
  rectangle net GND: 79.248,107.95 112.522,115.824
  rectangle net GND: 33.401,78.994 36.195,102.87
  rectangle net GND: 31.496,73.914 35.179,79.375
  rectangle net GND: 26.289,102.616 44.45,111.887

## Silkscreen, mask and mechanical layers (free items; w line width, h text height)
Mechanical 1:
  the board outline again, w1

## Text inside footprints (layer, text, board x,y; h text height)
C18: Top Overlay "+" at 86.843,121.924 h1.5 r90
C19: Top Overlay "+" at 102.337,121.924 h1.5 r90